# Allegro board BINSENSORS.brd
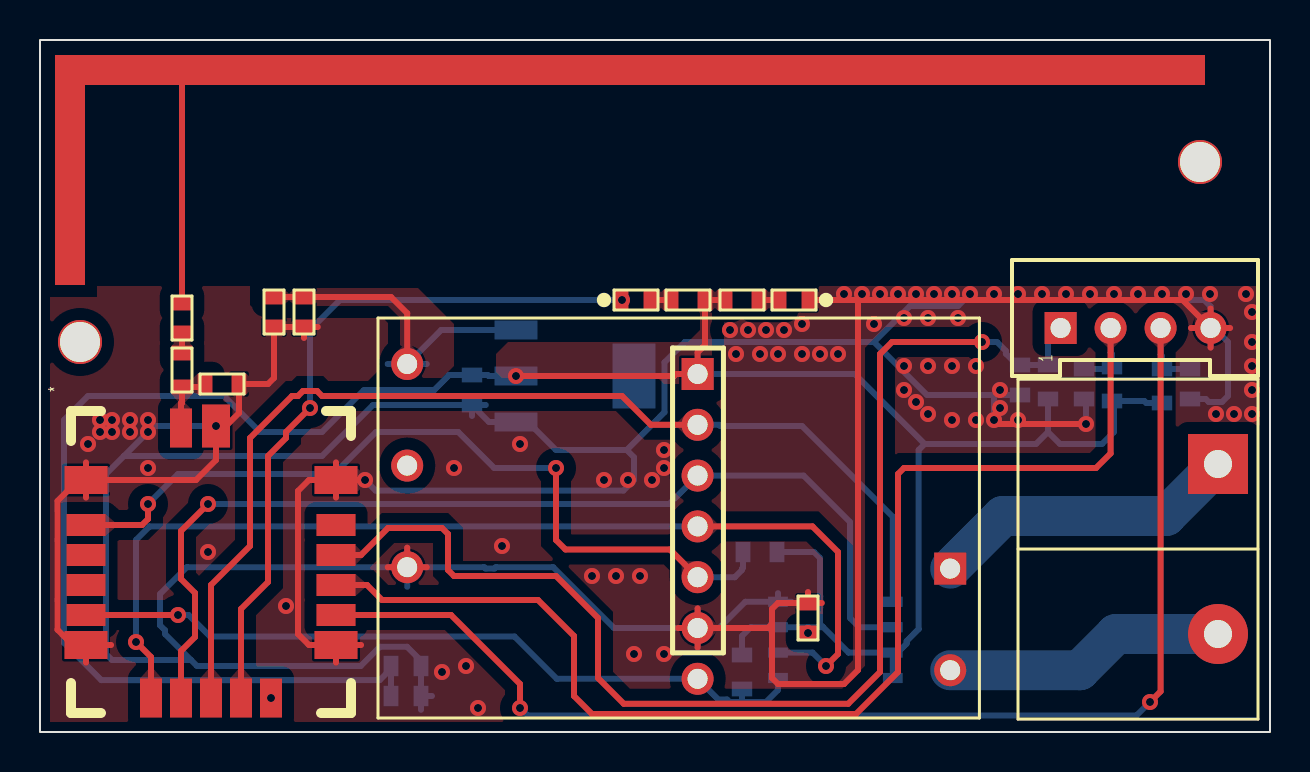
[diagram p0: board, top side]
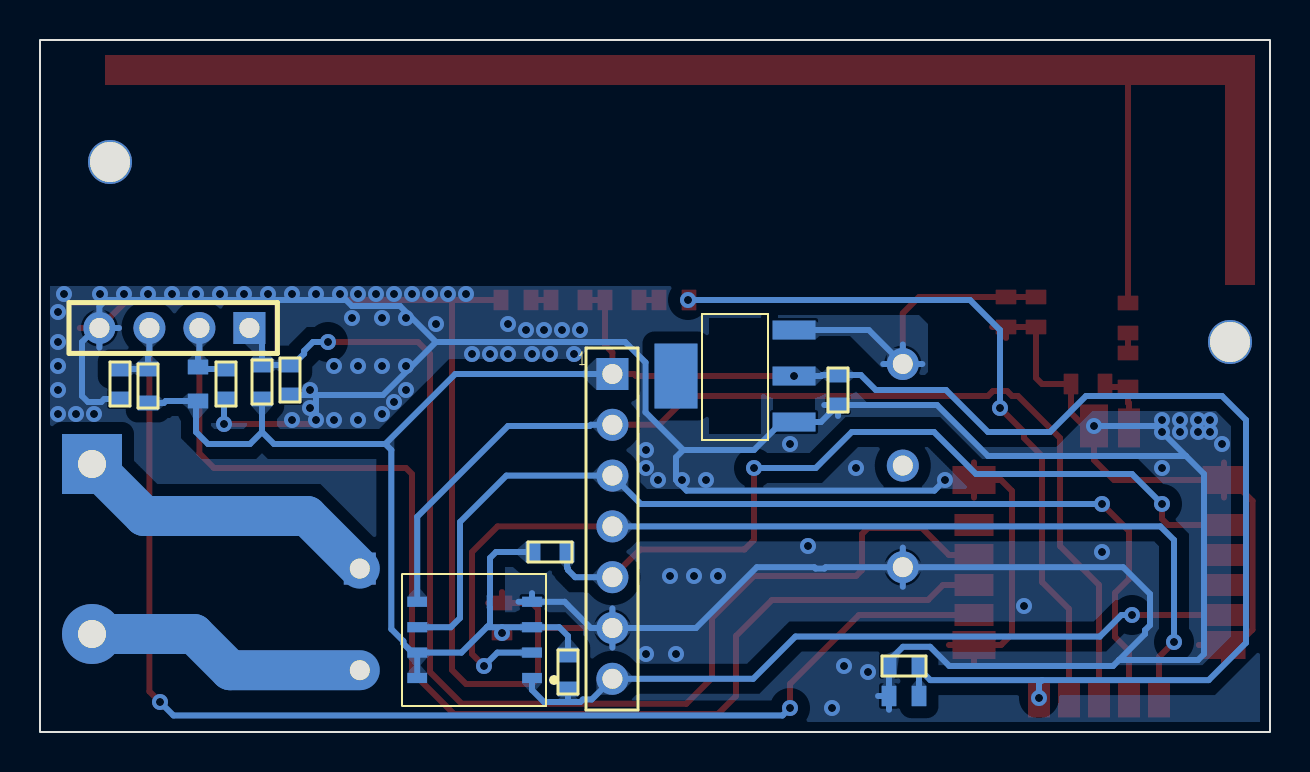
[diagram p1: board, bottom side, seen from below]

Outline 61.5 x 34.6 mm; copper layers: TOP, BOTTOM. Coordinates in mm from the lower left corner of the outline.
Outline path: rectangle 0,0 61.5,34.6

## Design rules (mm)
constraint set DEFAULT: min track width 0.3

## Placement (name value [footprint] x y rotation side)
AN1  MyAntena  [MYANTENA]  7.1 22.2 0 top
C1  104  [CAP_SMD_0603]  13.2 21 270 top
C2  104  [CAP_SMD_0603]  11.7 21 270 top
C3  104  [CAP_SMD_0603]  21.6 17.1 270 bottom
C4  104  [CAP_SMD_0603]  49 17.6 90 bottom
C5  104  [CAP_SMD_0603]  52.2 17.4 90 bottom
C6  104  [CAP_SMD_0603]  57.5 17.4 90 bottom
C7  33nF  [CAP_SMD_0603]  38.4 5.7 90 top
C8  3.3pF  [CAP_SMD_0603]  7.1 20.7 90 top
C9  33nF  [CAP_SMD_0603]  18.3 1.8 0 bottom
C10  4.7uF  [CAP_SMD_0603]  18.3 3.3 0 bottom
D1  PWM LED  [LED_SMD_0603]  37.7 21.6 180 top
D2  STATUS LED  [LED_SMD_0603]  29.8 21.6 0 top
J1  AC IN  [KF850_2P]  58.9 13.4 270 top
J2  BUTTON IN  [CONNECTOR4PINS]  52.3 20.2 0 top
J3  CON7  [J1_7_254]  27.8 17.9 270 bottom
L1  3.9 nH  [RES_SMD_0603]  9.1 17.4 0 top
M1  12V  [AC2DC_CONVERTER]  16.9 20.7 0 top
NOREF  -  [unnamed]  58 28.5 0 top
NOREF#2  -  [unnamed]  2 19.5 0 top
R1  10K  [RES_SMD_0603]  50.4 17.5 90 bottom
R2  10K  [RES_SMD_0603]  53.6 17.4 90 bottom
R3  10K  [RES_SMD_0603]  56.1 17.3 90 bottom
R4  10K  [RES_SMD_0603]  35.1 3 270 bottom
R6  10K  [RES_SMD_0603]  36 9 0 bottom
R7  0R  [RES_SMD_0603]  7.1 18.1 90 top
R8  330R  [RES_SMD_0603]  35.1 21.6 0 top
R9  330R  [RES_SMD_0603]  32.4 21.6 180 top
U1  AMS1117  [SOT223]  26.7 17.7 90 bottom
U2  25LC128-I/SN  [SOIC_8]  36.9 2.7 90 bottom
U3  ZM5202AU-CME3R  [ZM5202]  14.8 1.7 90 top

## Library data of the parts
AN1 = MyAntena
C1-C10 = CAPACITOR NON-POL
D1 D2 = LED
J1 = CON2
J2 = CON4
J3 = CON7
L1 = INDUCTOR
M1 = AC2DC_Module
R1-R4 R6-R9 = R
U1 = ASM1117
U2 = SPI EPPROM SOIC-8
U3 = ZM5202

## Footprints (pads in the part's own frame, mm; a bottom-side part is the same pattern mirrored in y, then rotated)
AC2DC_CONVERTER
  rect 1.6x1.6 hole 1: 1(28.61,-12.53)
  round 1.6 hole 1: 2(28.61,-17.61) 3(1.46,-2.3) 4(1.46,-7.38) 5(1.46,-12.46)
CAP_SMD_0603
  rect 0.74x1.02 smd: 1(-0.75,0) 2(0.75,0)
CONNECTOR4PINS
  rect 1.6x1.6 hole 1: 1(-1.27,0)
  round 1.6 hole 1: 2(1.23,0) 3(3.73,0) 4(6.23,0)
J1_7_254
  rect 1.6x1.6 hole 1: 1(0,-5.08)
  round 1.6 hole 1: 2(2.54,-5.08) 3(5.08,-5.08) 4(7.62,-5.08) 5(10.16,-5.08) 6(12.7,-5.08) 7(15.24,-5.08)
KF850_2P
  rect 3x3 hole 1.4: 1(0,0)
  round 3 hole 1.4: 2(8.5,0)
LED_SMD_0603
  rect 0.74x1.02 smd: 1(-0.75,0) 2(0.75,0)
MYANTENA
  rect 0.3x0.3 smd: 1(0,0)
RES_SMD_0603
  rect 0.74x1.02 smd: 1(-0.85,0) 2(0.85,0)
SOIC_8
  rect 0.51x0.99 smd: 1(0,0) 2(1.27,0) 3(2.54,0) 4(3.81,0) 5(3.81,5.74) 6(2.54,5.74) 7(1.27,5.74) 8(0,5.74)
SOT223
  rect 3.25x2.15 smd: (0.1,3)
  rect 0.95x2.15 smd: 1(-2.201,-2.901) 2(0.099,-2.901) 3(2.399,-2.901)
unnamed
  round 2.2 hole 2: (0,0)
ZM5202
  rect 1.4x2.15 smd: 1(10.9,12.5) 6(2.65,12.5) 12(2.65,0) 17(10.9,0)
  rect 1.1x1.95 smd: 2(8.65,12.5) 3(7.15,12.5) 4(5.65,12.5) 5(4.15,12.5) 13(4.15,0) 14(5.65,0) 15(7.15,0) 16(8.65,0)
  rect 1.95x1.1 smd: 7(0,9.25) 8(0,7.75) 9(0,6.25) 10(0,4.75) 11(0,3.25) 19(13.5,7.75)
  rect 2.15x1.4 smd: 18(13.6,6)

## Nets
3V3: C3.1 C7.1 C9.1 C10.1 J3.1 R1.1 R2.1 R3.1 R4.1 R6.2 R8.1 R9.1 U1.2(VOUT) U2.3(W\P) U2.7 U2.8 U3.11
12V: C1.1 C2.1 M1.3 U1.3
GND: C1.2 C2.2 C3.2 C4.1 C5.1 C6.1 C7.2 C9.2 C10.2 D1.1(CATHODE) J2.4 J3.6 L1.2 M1.5 U1.1 U2.4 U3.1 U3.6 U3.12 U3.17 U3.18
AC1: J1.1 M1.1
AC2: J1.2 M1.2(AC2)
BUTTON1: C4.2 J2.1 R1.2 U3.15
BUTTON2: C5.2 J2.2 R2.2 U3.14
BUTTON3: C6.2 J2.3 R3.2 U3.13
MISO: J3.4 U2.2 U3.7
MOSI: J3.2 U2.5 U3.9
P1.5: J3.7 R4.2 U2.1 U3.5
SCK: J3.3 U2.6 U3.8
STATUS: D2.1(CATHODE) U3.10
ZWAVE_RESET: J3.5 R6.1 U3.2
N354221: AN1.1(AN) C8.2
N354357: L1.1 R7.1 U3.19
N3543271: C8.1 R7.2
N3590351: D1.2 R8.2
N3591881: D2.2 R9.2

Pads without a net: M1 4; U3 3 4 16

## Via types
v1: diameter 0.8, hole 0.4, TOP to BOTTOM, 99 vias

## Routing (per net, layer and track width the routed paths; a pad name or vN(x,y) marks a point on that pad's centre or on a via; arc(x,y) is an arc through that point)
3V3: length 126.6
  TOP w0.3: v1(23.8,17.8) 31.7,17.8 31.8,17.9 J3.1 32.88,18.98 33.25,19.35 R9.1 R8.1
  BOTTOM w0.3: 44.23,14.4 43.93,14.1 43.93,5.15 43.33,4.54 43.33,4.42 42.88,3.97 U2.7 ; 44.23,14.4 40.73,17.9 J3.1 ; 44.23,14.4 49.8,14.4 50.4,15 ; 38.4,5.24 U2.3 35.54,5.24 35.1,4.8 R4.1 ; 38.4,5.24 39.16,5.24 ; 38.4,5.24 v1(38.4,4.95) ; R6.2 38.7,9 39,8.7 39,6.81 39.01,6.8 39.01,6.22 39,6.21 39,5.4 39.16,5.24 ; 11.4,2.59 3.07,2.59 1.2,4.46 1.2,15.6 2.4,16.8 9.2,16.8 11,15 14.1,15 16.2,17.1 19.71,17.1 20.46,17.85 C3.1 22.39,17.85 22.44,17.8 v1(23.8,17.8) ; 11.4,2.59 16.98,2.59 17.55,3.16 ; 11.4,2.59 11.55,2.44 v1(11.55,1.7) ; U2.7 U2.8 ; U2.7 40.43,3.97 39.16,5.24 ; 17.55,3.16 C9.1 ; 17.55,3.16 C10.1 ; 50.4,15 51,14.4 53.1,14.4 53.7,15 53.7,16.45 R2.1 55.21,16.55 55.31,16.45 R3.1 ; 50.4,15 R1.1
12V: length 18.6
  TOP w0.3: M1.3 18.36,20.94 17.55,21.75 C1.1 C2.1
  BOTTOM w0.3: M1.3 19.34,18.4 ; M1.3 18.36,19.38 ; M1.3 20.06,20.1 U1.3 ; M1.3 17.38,18.4
GND: length 293.3
  TOP w0.3: 2.3,11.72 U3.1 ; U3.1 1.92,12.6 0.88,11.55 0.88,5.11 1.64,4.35 U3.6 ; U3.1 2.3,13.48 ; U3.1 7.8,12.6 8.8,13.6 v1(8.8,15.3) 9.3,15.3 9.95,15.95 L1.2 11.4,17.4 11.7,17.7 C2.2 C1.2 ; J2.4 57.13,21.6 40.8,21.6 ; J2.4 59.51,20.2 ; J2.4 58.53,21.18 ; J2.4 58.53,19.22 ; J2.4 57.55,20.2 ; C7.2 38.4,7 ; C7.2 36.9,6.45 36.6,6.15 36.6,5.4 ; C7.2 39.09,6.45 ; J3.6 32.88,6.18 ; J3.6 36.4,5.2 36.6,5.4 ; J3.6 32.88,4.22 ; J3.6 31.9,5.2 ; U3.6 3.55,4.35 ; U3.6 2.3,3.47 ; U3.17 v1(16.25,12.6) ; U3.17 14.8,13.48 ; U3.17 14.8,11.72 ; U3.17 13.45,12.6 12.9,12.05 12.9,4.9 13.45,4.35 U3.12 ; U3.12 14.8,3.47 ; U3.12 16.05,4.35 ; 13.2,19.7 C1.2 ; C1.2 13.89,20.25 ; 40.8,21.6 D1.1 ; 40.8,21.6 40.9,21.5 40.9,3.1 40.2,2.4 36.9,2.4 36.6,2.7 36.6,5.4 ; v1(52.3,15.4) 47.9,15.4 v1(47.7,15.6) ; M1.5 18.36,9.22 ; M1.5 17.38,8.24 ; M1.5 19.34,8.24
  BOTTOM w0.3: 32.88,4.22 J3.6 ; J3.6 28.7,5.2 25.66,8.24 22.79,8.24 22.72,8.17 22.28,8.17 22.21,8.24 M1.5 ; J3.6 32.88,6.18 ; J3.6 33.96,5.2 35.27,6.51 U2.4 ; v1(16.25,12.6) 16.78,12.07 29.17,12.07 29.7,12.6 29.7,13.74 29.34,14.1 ; 58.53,19.22 J2.4 ; J2.4 57.55,20.2 ; J2.4 58.7,20.2 59.4,19.5 59.4,16.8 59.1,16.5 58.44,16.5 58.29,16.65 C6.1 ; J2.4 58.53,21.28 58.21,21.6 46.2,21.6 45.9,21.3 43.5,21.3 41.7,19.5 ; 7.55,3.6 7.85,3.3 16.03,3.3 16.99,4.26 18.35,4.26 19.05,3.56 C10.2 C9.2 ; 7.55,3.6 6.25,4.9 6.25,5.09 6,5.34 6,6.9 7.34,8.24 M1.5 ; 7.55,3.6 3.6,3.6 3.3,3.9 3.3,12.9 4.2,13.8 ; 19.05,1.11 C9.2 ; C9.2 19.6,1.8 ; C3.2 22.45,15.5 U1.1 24.4,15.5 25.8,14.1 29.34,14.1 ; C3.2 16.65,16.35 14.1,13.8 4.2,13.8 ; C3.2 22.29,16.35 ; C3.2 21.6,15.8 ; 41.7,19.5 44.35,16.85 47.7,16.85 ; 41.7,19.5 32.24,19.5 31.23,18.48 31.23,15.99 29.34,14.1 ; 47.7,16.85 C4.1 ; 47.7,16.85 v1(47.7,15.6) ; 4.2,13.8 v1(5.4,15) 5.7,15.3 v1(8.8,15.3) ; 18.36,7.26 M1.5 ; M1.5 18.36,9.22 ; v1(52.3,15.4) 52.3,16.65 C5.1 ; U2.4 37.57,6.51 ; U2.4 36.9,6.94
  vias: v1(2.4,14.4) v1(3,15.6) v1(3,15) v1(3.6,15.6) v1(3.6,15) v1(4.5,15.6) v1(4.5,15) v1(5.4,15.6) v1(5.4,13.2) v1(8.4,9) v1(12.3,6.3) v1(20.1,3) v1(20.7,13.2) v1(21.3,3.3) v1(21.9,1.2) v1(23.1,9.3) v1(24,14.4) v1(27.6,7.8) v1(28.2,12.6) v1(28.8,7.8) v1(29.4,12.6) v1(29.7,3.9) v1(30,7.8) v1(30.6,12.6) v1(31.2,14.1) v1(31.2,13.2) v1(31.2,3.9) v1(34.5,20.1) v1(34.8,18.9) v1(35.4,20.1) v1(36,18.9) v1(36.3,20.1) v1(36.9,18.9) v1(37.2,20.1) v1(38.1,20.4) v1(38.1,18.9) v1(39,18.9) v1(39.9,18.9) v1(40.2,21.9) v1(41.1,21.9) v1(41.7,20.4) v1(42,21.9) v1(42.9,21.9) v1(43.2,20.7) v1(43.2,18.3) v1(43.2,17.1) v1(43.8,21.9) v1(43.8,16.5) v1(44.4,20.7) v1(44.4,18.3) v1(44.4,15.9) v1(44.7,21.9) v1(45.6,21.9) v1(45.6,18.3) v1(45.6,15.6) v1(45.9,20.7) v1(46.5,21.9) v1(46.8,18.3) v1(46.8,15.6) v1(47.7,21.9) v1(48,17.1) v1(48,16.2) v1(48.9,21.9) v1(48.9,15.6) v1(50.1,21.9) v1(51.3,21.9) v1(52.5,21.9) v1(53.7,21.9) v1(54.9,21.9) v1(56.1,21.9) v1(57.3,21.9) v1(58.5,21.9) v1(58.8,15.9) v1(59.7,15.9) v1(60.3,21.9) v1(60.6,21) v1(60.6,19.5) v1(60.6,18.3) v1(60.6,17.1) v1(60.6,15.9)
AC1: length 15.6
  BOTTOM w2: J1.1 56.3,10.8 48.14,10.8 M1.1
AC2: length 14.1
  BOTTOM w2: M1.2 51.99,3.09 53.8,4.9 J1.2
BUTTON1: length 62.1
  TOP w0.3: U3.15 16.05,8.85 17.4,10.2 20.1,10.2 20.4,9.9 20.4,8.1 20.7,7.8 25.8,7.8 27.9,5.7 27.9,2.7 29.19,1.41 40.41,1.41 42,3 42,18.9 42.6,19.5 v1(47.1,19.5)
  BOTTOM w0.3: J2.1 50.4,19.57 R1.2 C4.2 48.86,18.35 48.29,18.92 48.29,19.06 47.85,19.5 v1(47.1,19.5)
BUTTON2: length 64.1
  TOP w0.3: J2.2 53.53,13.93 52.8,13.2 43.2,13.2 42.9,12.9 42.9,3 40.8,0.9 27.6,0.9 26.7,1.8 26.7,4.8 24.9,6.6 17.1,6.6 16.35,7.35 U3.14
  BOTTOM w0.3: C5.2 53.6,18.15 R2.2 53.6,18.9 53.53,18.97 J2.2
BUTTON3: length 66.2
  TOP w0.3: U3.13 20.55,5.85 24,2.4 v1(24,1.2) ; v1(55.5,1.5) 56.03,2.03 J2.3
  BOTTOM w0.3: v1(55.5,1.5) 54.83,0.83 24.37,0.83 v1(24,1.2) ; J2.3 56.03,18.87 56.1,18.8 R3.2 C6.2
MISO: length 52.7
  TOP w0.3: v1(4.8,4.5) 5.55,3.75 U3.7 ; J3.4 38.62,10.28 39.9,9 39.9,3.9 v1(39.3,3.3)
  BOTTOM w0.3: J3.4 5.48,10.28 4.8,9.6 v1(4.8,4.5) ; v1(39.3,3.3) 38.63,3.97 U2.2
MOSI: length 53.8
  TOP w0.3: U3.9 8.55,7.35 10.5,9.3 10.5,14.7 12.6,16.8 12.9,16.8 13.15,17.05 13.85,17.05 14.1,16.8 29.1,16.8 30.54,15.36 J3.2
  BOTTOM w0.3: U2.5 42.64,10.76 38.1,15.3 34.02,15.3 33.96,15.36 J3.2
P1.5: length 37.9
  TOP w0.3: U3.5 v1(6.9,5.85)
  BOTTOM w0.3: 35.1,1.5 34.48,1.5 34.35,1.63 33.91,1.63 J3.7 25.84,2.66 23.73,4.77 8.5,4.77 7.43,5.85 v1(6.9,5.85) ; 35.1,1.5 36.3,1.5 36.9,2.1 U2.1 ; 35.1,1.5 R4.2
SCK: length 51.6
  TOP w0.3: v1(8.4,11.4) 7.05,10.05 7.05,7.65 7.75,6.95 7.75,4.75 7.05,4.05 U3.8
  BOTTOM w0.3: v1(8.4,11.4) 31.46,11.4 J3.3 38.18,12.82 40.5,10.5 40.5,5.7 40.96,5.24 U2.6
STATUS: length 36.1
  TOP w0.3: U3.10 10.05,6.15 11.4,7.5 11.4,13.8 12.3,14.7 12.3,15 v1(13.5,16.2)
  BOTTOM w0.3: v1(13.5,16.2) 13.5,20.1 15,21.6 v1(29.1,21.6)
ZWAVE_RESET: length 41.4
  TOP w0.3: v1(5.4,11.4) 5.4,10.65 5.1,10.35 U3.2 ; J3.5 31.49,9.13 26.27,9.13 25.8,9.6 v1(25.8,13.2)
  BOTTOM w0.3: v1(5.4,11.4) 6.9,12.9 14.7,12.9 16.8,15 20.91,15 22.71,13.2 v1(25.8,13.2) ; R6.1 35.15,8.21 35.1,8.16 35.1,8.1 34.74,7.74 J3.5
N354221: length 0.8
  TOP w0.3: C8.2 AN1.1
N354357: length 3.4
  TOP w0.3: U3.19 7.05,16.45 7.1,16.45 R7.1 8.25,17.25 L1.1
N3543271: length 1
  TOP w0.3: R7.2 C8.1
N3590351: length 1
  TOP w0.3: R8.2 D1.2
N3591881: length 1
  TOP w0.3: D2.2 R9.2

## Copper pours and planes (outline as drawn; the poured copper is in the pictures)
3V3 on TOP: 33.6,17.4 31.2,17.4 30.9,17.7 23.1,17.7 22.8,18 22.8,18.9 23.4,19.5 32.4,19.5 33,20.1 33,21.9 33.3,22.2 34.5,22.2 34.5,21.3 33.6,21.3
12V on TOP: 17.7,18 18.6,18 18.9,17.7 20.1,17.7 20.7,18.3 20.7,20.4 18.9,22.2 11.1,22.2 11.1,21.6 11.4,21.3 17.4,21.3 18,20.7 18,18.3
12V on BOTTOM: 24.6,19.8 24.6,21 24.3,21.3 18,21.3 17.1,20.4 17.1,18 17.4,17.7 18.9,17.7 21,19.8
GND on TOP: 0.5,0.5 0.5,34.1 61,34.1 61,0.5 ; 7 cut-outs
GND on BOTTOM: 0.5,0.5 0.5,34.1 61,34.1 61,0.5 ; 11 cut-outs
Net_1 on TOP (solid shape): 58.25,32.35 7.25,32.35 7.25,22.35 6.95,22.35 6.95,32.35 2.25,32.35 2.25,22.35 0.75,22.35 0.75,33.85 58.25,33.85

Small or netless copper shapes (teardrops, artwork), in the pictures only: 39 on TOP, 54 on BOTTOM
